# Altium PCB Elektromagnet_Driver_EUROBOT_2016_PCB.PcbDoc
Units mil, origin at the board's own origin, x right, y up, seen from the top; angles counter-clockwise.
Board outline 1975 x 1325 mil, 2 copper layers (Top Layer, Bottom Layer); 18 components, 13 nets, 40 pads, 4 vias.
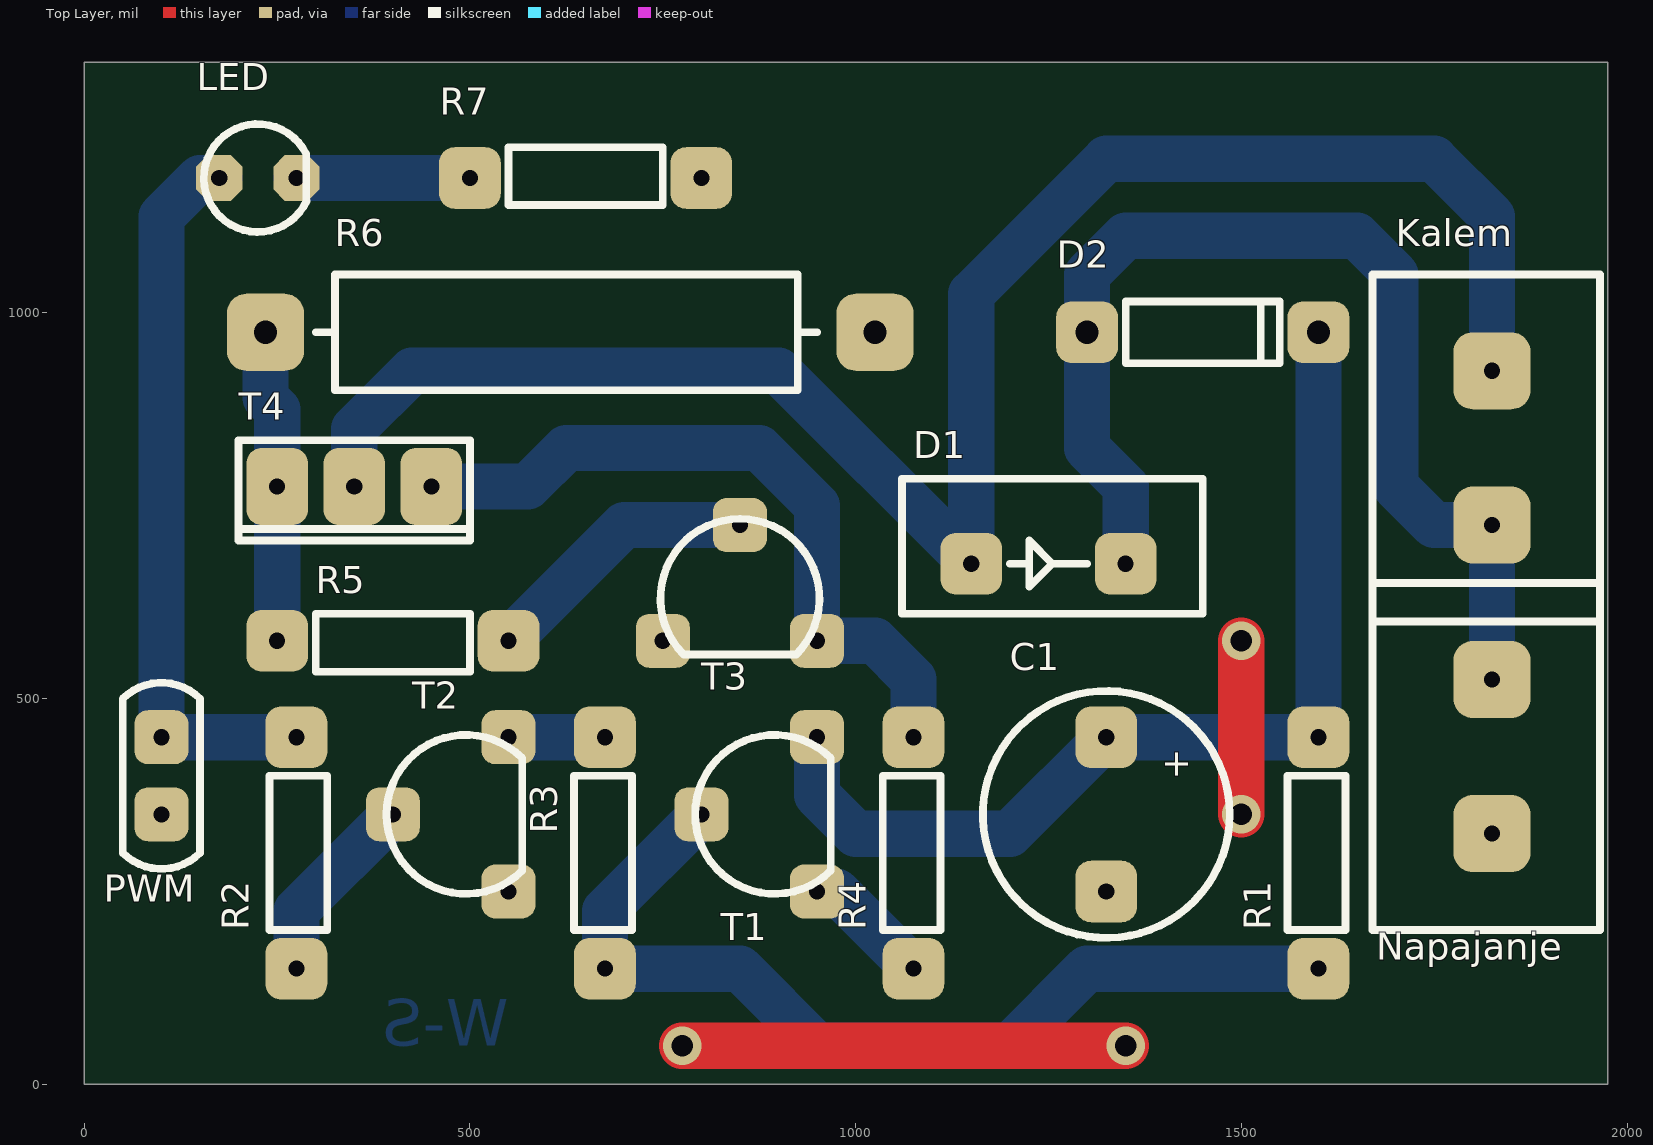
[diagram p0: Top Layer view]
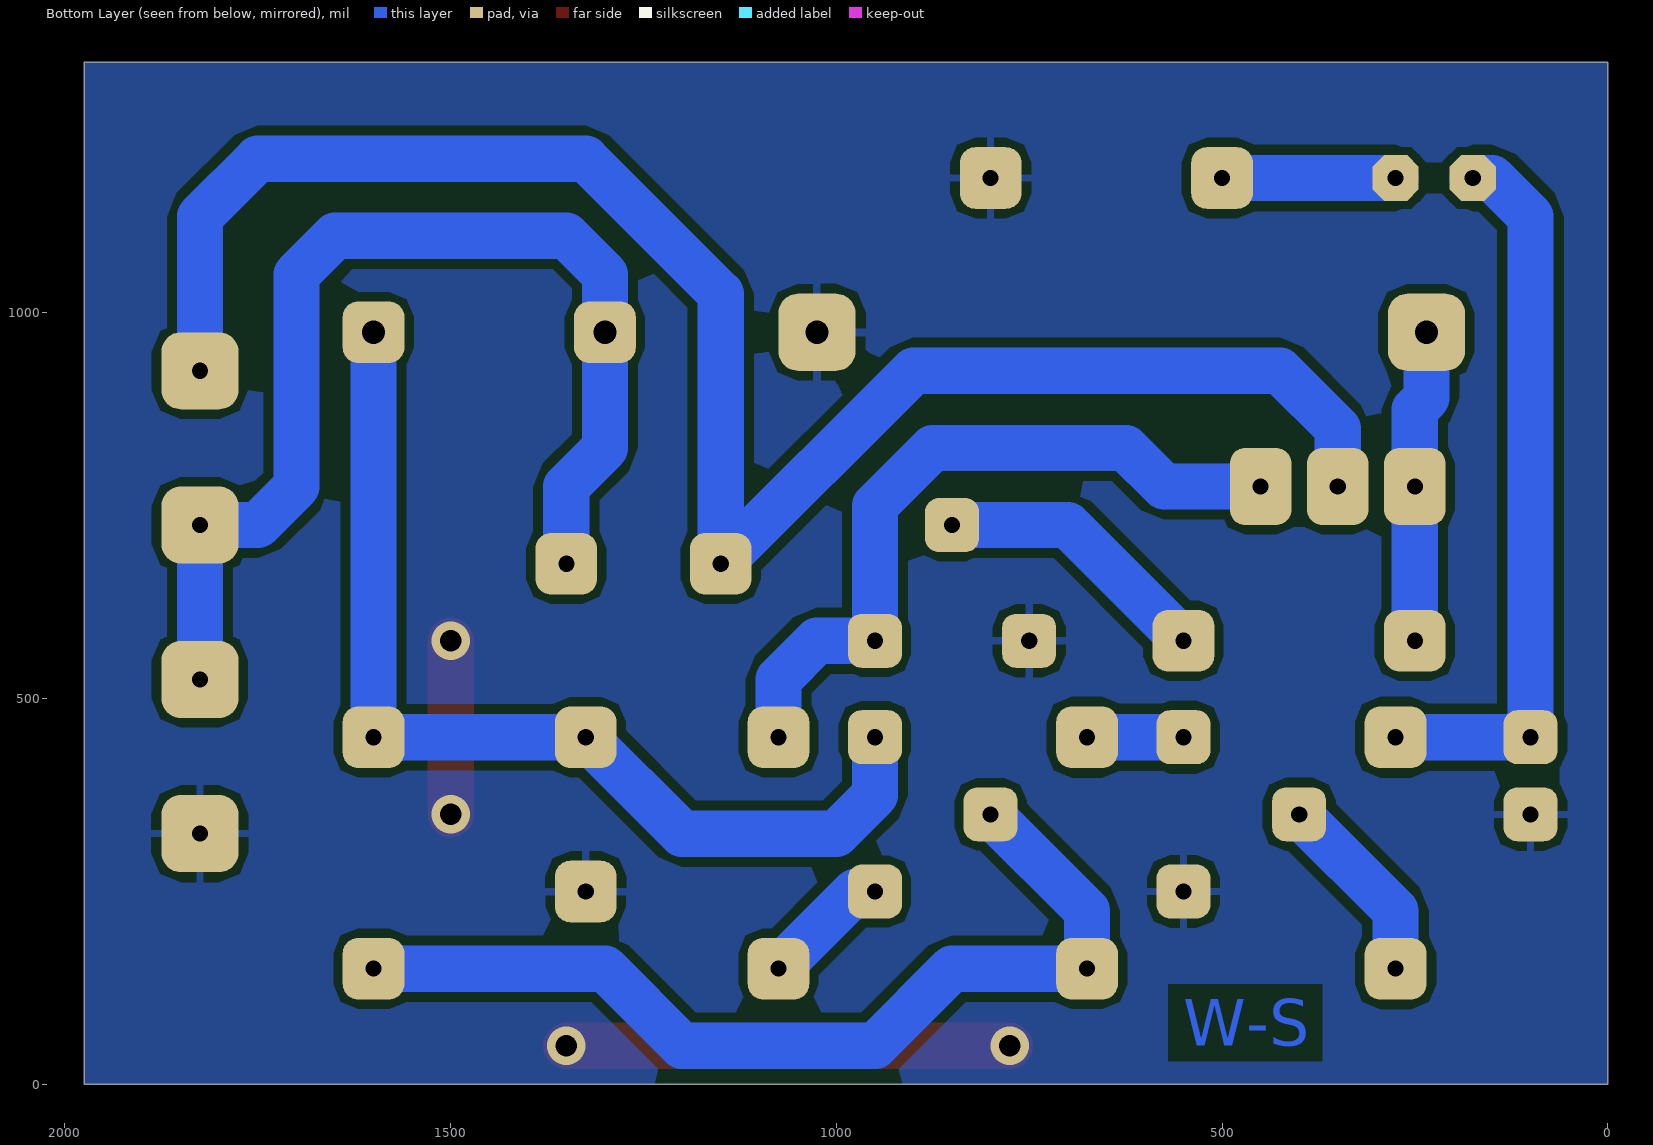
[diagram p1: Bottom Layer view, seen from below]
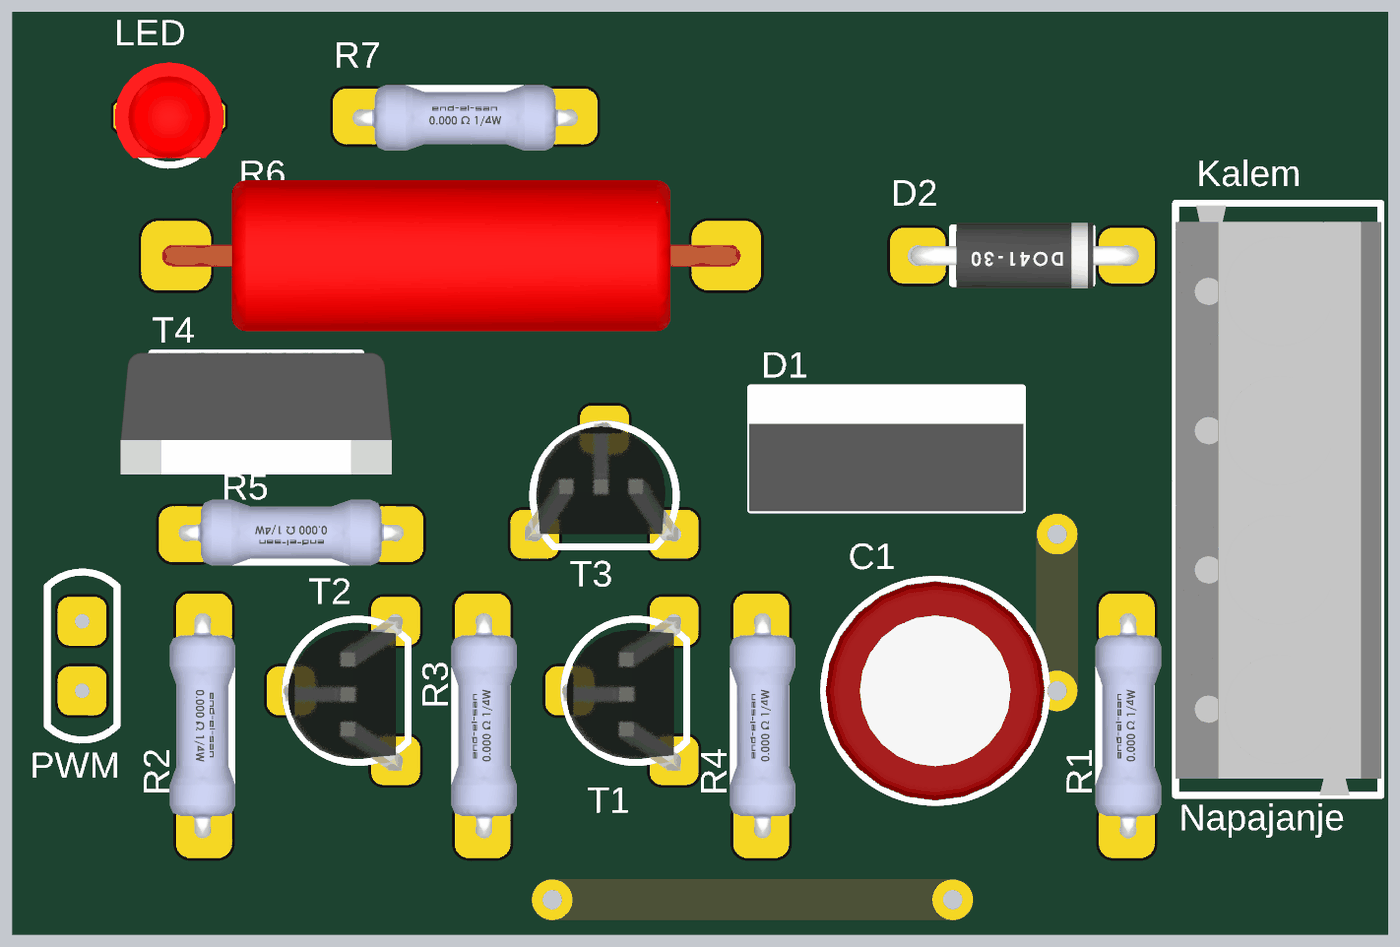
[diagram p2: 3D render of the assembled board from above, using the file's embedded part models]

## Layer stack, top to bottom
Top Solder: solder mask 0.4, Solder Resist, Dk 3.5
Top Layer: signal copper 1.4
Dielectric 1: dielectric 12.6, FR-4, Dk 4.8
Bottom Layer: signal copper 1.4
Bottom Solder: solder mask 0.4, Solder Resist, Dk 3.5

## Board outline
0,0 1975,0 1975,1325 0,1325

## Design rules (kind name [scope] priority, off if disabled: settings)
Clearance [All] p1: gap=10
PolygonConnect [All] p1: connectstyle=Relief reliefconductorwidth=10 reliefentries=4 polygonreliefangle="90 Angle" airgapwidth=10
RoutingVias [All] p1: holewidth=28 width=50 viastyle="Through Hole" minholewidth=28 minwidth=50 maxholewidth=28 maxwidth=50
SolderMaskExpansion [All] p1: expansion=4
UnpouredPolygon [All] p1: allowunpoured=FALSE
Width [All] p1: maxlimit=60 minlimit=20 preferedwidth=40 minimp=50.000000 maximp=50.000000 favimp=50.000000
29 further rules are at their usual default settings.

## Components (designator, comment, footprint, x,y, rotation, side; value= is the part's Value field where it differs from the comment)
C1 "C2" C2(elektrolit) 1325,450 r270 top
D1 "MBR1660" D2(TO220) 1150,675 r0 top
D2 "D1" D1(300milsa) 1300,975 r0 top
Kalem "Klema" Klema 1825,925 r270 top
LED "LED" LED(3mm) 175,1175 r0 top (schematic designator *)
Napajanje "Klema" Klema 1825,525 r270 top
PWM "Header1x2" Header1x2 100,450 r270 top
R1 "1K" R1(300milsa) 1600,150 r90 top
R2 "R1" R1(300milsa) 275,450 r270 top
R3 "1K" R1(300milsa) 675,150 r90 top
R4 "470" R1(300milsa) 1075,150 r90 top
R5 "100" R1(300milsa) 550,575 r180 top
R6 "0.15" R1(2W) 1025,975 r180 top
R7 "240" R1(300milsa) 500,1175 r0 top
T1 "BC556" BC327 950,250 r90 top
T2 "BC546" BC327 550,250 r90 top
T3 "BC546" BC327 750,575 r0 top
T4 "FET2" TO220 450,775 r180 top

## Footprints (in the part's own frame and the unit in brackets; to place one, negate y for a bottom-side part, rotate by r counter-clockwise, add the part's x,y. Pads: shape width x height; smd on the part's side, far side on the other; paste and mask are expansions set on the pad)
BC327 [mil]
  rrect50% 70x70 hole 21: 1(100,150) 2(200,0) 3(0,0)
  silkscreen extent -3,-18 203,158, body extent -15,-9 205,159, height 385
C2(elektrolit) [mil]
  rrect50% 80x80 hole 21: 1(0,0) 2(200,0)
  silkscreen extent -60,-160 260,160, body extent -57,-157 257,157, height 522
D1(300milsa) [mil]
  rrect50% 80x80 hole 30: 1(0,0) 2(300,0)
  silkscreen extent 50,-40 250,40, body extent -10,-47 318,47, height 100
D2(TO220) [mil]
  rrect50% 80x80 hole 21: 1(0,0) 2(200,0)
  silkscreen extent -90,-65 300,110, body extent -92,-67 302,110, height 769
Header1x2 [mil]
  rrect50% 70x70 hole 21: 1(0,0) 2(100,0)
  silkscreen extent -71,-50 171,50
Klema [mil]
  rrect50% 100x100 hole 21: 1(0,0) 2(200,0)
  silkscreen extent -125,-155 325,140, body extent -122,-155 325,140, height 392
LED(3mm) [mil]
  oct 60x60 hole 21: 1(0,0) 2(100,0)
  silkscreen extent -20,-70 114,70, body extent -28,-60 128,77, height 212
R1(2W) [mil]
  rrect50% 100x100 hole 30: 1(0,0) 2(790,0)
  silkscreen extent 75,-75 725,75, body extent -21,-108 811,108, height 208
R1(300milsa) [mil]
  rrect50% 80x80 hole 21: 1(0,0) 2(300,0)
  silkscreen extent 50,-35 250,40, body extent -12,-49 312,45, height 95
TO220 [mil]
  rrect50% 80x100 hole 21: 1(0,0) 2(100,0) 3(200,0)
  silkscreen extent -50,-60 250,70, body extent -95,-61 295,114, height 746

## Part data
D1: library part "Sotki Diode"
R1 R3 R4 R5 R6 R7: library part R1
T1: library part "Transistor PNP"
T2 T3: library part "Transistor NPN"

## Via types
v1: diameter 50, hole 28, Top Layer to Bottom Layer, 4 vias

## Nets (pads, with @x,y where several pads share a name; then routed paths per layer and width w, separated by ;. In a path a pad name is that pad's centre, name@x,y a point inside that pad or via, vN(x,y) a via of type N, cw(c..) or ccw(c..) an arc to the next point about the centre after c; other vN are vias at no path point)
GND: C1.2 Napajanje.2 PWM.2 R6.1 R7.2 T2.3 T3.3 | length 800
  Top Layer w60: v1(775,50) v1(1350,50) ; v1(1500,350) v1(1500,575)
Net*_1: LED.1 PWM.1 R2.1 | length 945.7
  Bottom Layer w60: LED.1 150,1175 100,1125 PWM.1 R2.1
Net*_2: LED.2 R7.1 | length 225
  Bottom Layer w60: LED.2 R7.1
NetC1_1: C1.1 D2.2 R1.2 T1.2 | length 1322.5
  Bottom Layer w60: T1.2 950,375 1000,325 1200,325 C1.1 R1.2 D2.2
NetD1_1: D1.1 Kalem.1 T4.2 | length 2338.2
  Bottom Layer w60: T4.2 350,850 425,925 900,925 D1.1 1150,1025 1325,1200 1750,1200 1825,1125 Kalem.1
NetD1_2: D1.2 D2.1 Kalem.2 Napajanje.1 | length 1457.8
  Bottom Layer w60: D1.2 1350,775 1300,825 D2.1 1300,1050 1350,1100 1650,1100 1700,1050 1700,775 1750,725 Kalem.2 Napajanje.1
NetR1_1: R1.1 R3.1 T1.1 | length 1259.6
  Bottom Layer w60: T1.1 675,225 R3.1 850,150 950,50 1200,50 1300,150 R1.1
NetR2_2: R2.2 T2.1 | length 251.8
  Bottom Layer w60: R2.2 275,225 T2.1
NetR3_2: R3.2 T2.2 | length 125
  Bottom Layer w60: T2.2 R3.2
NetR4_1: R4.1 T1.3 | length 166.4
  Bottom Layer w60: T1.3 975,250 R4.1
NetR4_2: R4.2 T3.2 T4.1 | length 947.5
  Bottom Layer w60: T4.1 575,775 625,825 875,825 950,750 T3.2 1025,575 1075,525 R4.2
NetR5_1: R5.1 T3.1 | length 362.1
  Bottom Layer w60: R5.1 700,725 T3.1
NetR5_2: R5.2 R6.2 T4.3 | length 406.2
  Bottom Layer w60: R6.2 235,890 250,875 T4.3 R5.2

## Polygon pours and split planes (outlines as drawn)
GND on Bottom Layer "Bottom Layer-gnd" (solid, remove dead copper, pour order 2): 0,0 0,1325 1975,1325 1975,0

## Other copper
Bottom Layer:
  text "W-S" at 550,50 h60

## Silkscreen, mask and mechanical layers (free items; w line width, h text height)
Mechanical 1:
  the board outline again, w10

## Text inside footprints (layer, text, board x,y; h text height)
C1: Top Overlay "+" at 1390,435 h60 r270